# Altium PCB DCDC_POWER_SUPPLY_V2.PcbDoc (part 2 of 3)
Units mm, origin at the board's own origin, x right, y up, seen from the top; angles counter-clockwise.
Board outline 41 x 24.5 mm, 4 copper layers (Top Layer, GND 1, GND 2, Bottom Layer), stack 0.603 mm thick; 49 components, 29 nets, 141 pads, 132 vias.
Unrouted connection lines stored in the file: 1.
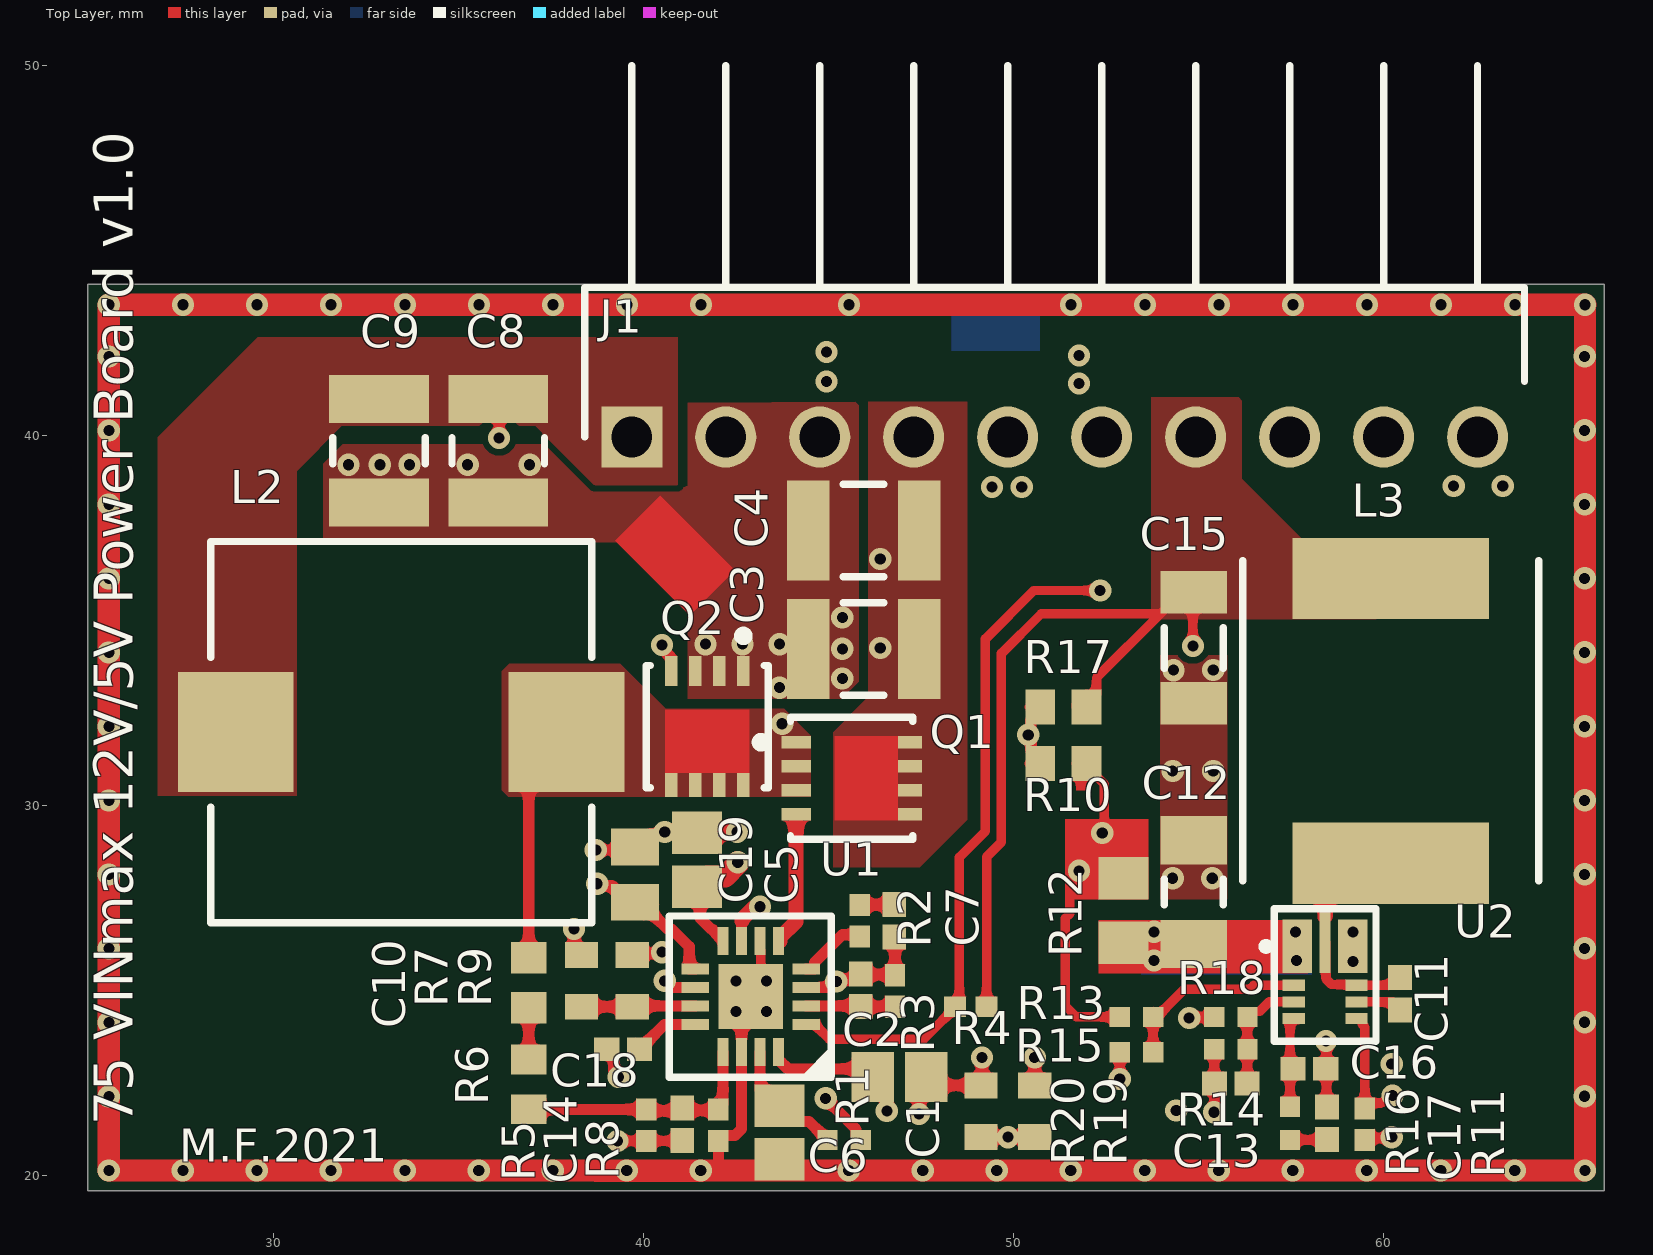
[diagram p0: Top Layer view]

## Part data (continued)
L2: library part CMP-2000-06447-1, "Low Profile, High Current IHLP(R) Inductor, 100 uH, +/- 20%, 2.5 A, -55 to 125 degC, 2-Pin SMD, RoHS, Tape and Reel", Case/Package=4040, Current=1.3A, Current Rating=2.5A, DC Resistance (DCR)=270mR, Inductance Tolerance=20%, Manufacturer=Vishay, Manufacturer Part Number=IHLP4040DZER101M11, Max DC Current=2.25A, Max Operating Temperature=125°C, Maximum DC Resistance=270mOhms, Min Operating Temperature=-55°C, Operating Temperature Range=-55Cto+125C, Package Description="2-Pin Surface Mount Device, Body 10.3 x 10.3 mm", Package Quantity=1, Self Resonant Frequency=1MHz, Test Frequency=100kHz, Brand=Vishay/Dale, Category="Fixed Inductors", ComponentLink1Description=https://datasheet.ciiva.com/11798/0900766b8102c938-11798178.pdf?src-supplier=RSComponents, ComponentLink1URL=https://datasheet.ciiva.com/11798/0900766b8102c938-11798178.pdf?src-supplier=RSComponents, ComponentLink2Description=https://datasheet.ciiva.com/8494/lp40dz11-8494200.pdf?src-supplier=Avnet, ComponentLink2URL=https://datasheet.ciiva.com/8494/lp40dz11-8494200.pdf?src-supplier=Avnet, ComponentLink3Description=https://datasheet.ciiva.com/8017/27487-8017341.pdf?src-supplier=Element14, ComponentLink3URL=https://datasheet.ciiva.com/8017/27487-8017341.pdf?src-supplier=Element14, ComponentLink4Description=https://datasheet.ciiva.com/8017/27487-8017342.pdf?src-supplier=Element14, ComponentLink4URL=https://datasheet.ciiva.com/8017/27487-8017342.pdf?src-supplier=Element14, Contact Plating=Tin, Core Material=Ferrite,Metal,Composite, Datasheet URL=http://www.vishay.com/docs/34192/lp40dz11.pdf, Datasheet Version=08/2015, Depth=10.3mm, Factory Pack Quantity=500, Height=4mm, Height - Seated (Max)=0.157inch, Inductance=100uH, Lead Free="Lead Free", Length=10.3mm, Manufacturer URL=http://www.vishay.com/, Maximum DC Current=2.25A, Military Standard=Not, Mount="Surface Mount,Through Hole", Mounting Style=SMD/SMT, Mounting Technology=SurfaceMount, Number of Pins=2, Package / Case=4040, Package Reference=IHLP4040DZER101M11, Packaging=Reel, Pricing 1="500=0.59680, 1000=0.58220, 2000=0.57400, 3000=0.54128, 4000=0.52934, 5000=0.51740, 50000=0.48006 (USD)", Product=PowerInductors, Product Category=FixedInductors, Qualification=AEC-Q200, Radiation Hardening=No, REACH SVHC=Unknown, RMS Current (Irms)=2.5A, RoHS=True, Saturation Current=2.25A, Series=IHLP-4040DZ-11, Shielding=Shielded, Stock 1=10000, Supplier 1=Avnet, Supplier Part Number 1=IHLP4040DZER101M11, Termination=SMD/SMT, Termination Style=SMD/SMT, Tolerance=20%, Tradename=IHLP, Type=LowProfileHighCurrentIHLPInductor, Unit Weight=0.070548oz, Weight=0.070548oz, Width=10.3mm
L3: library part MPX1D0840L470, "Inductor 22uH", Manufacturer_Name=Kemet, Manufacturer_Part_Number=MPX1D0840L220, Mouser Part Number=80-MPX1D0840L220, Datasheet Link=https://componentsearchengine.com/Datasheets/1/MPX1D0840L470.pdf, Height=4mm, Mouser Price/Stock=https://www.mouser.com/Search/Refine.aspx?Keyword=80-MPX1D0840L470
Q1 Q2: library part CMP-1091-00311-1, "N-Channel OptiMOS 3 Power-Transistor, 80 V VDS, 23 A ID, -55 to 150 degC, PG-TSDSON-8-1, Reel, Green", Manufacturer=Infineon, ComponentLink1Description="Manufacturer URL", ComponentLink1URL=http://www.infineon.com/, ComponentLink2Description=Datasheet, ComponentLink2URL=http://www.infineon.com/dgdl/BSZ340N08NS3G_rev2.3.pdf?folderId=db3a304313b8b5a60113cee8763b02d7&fileId=db3a30431ff9881501206626660b6c72, ComponentLink3Description="Package Specification", ComponentLink3URL=http://www.infineon.com/dgdl/BSZ240N12NS3+Rev2.0.pdf?folderId=db3a304313b8b5a60113cee8763b02d7&fileId=db3a30432a40a650012a42f3057a0038, DatasheetVersion="Rev. 2.3", Green=TRUE, Halogen-free=TRUE, ID (max)="23Â A", IDpuls (max)="92Â A", Mounting Technology="Surface Mount", PackageDescription="8-Pin Plastic (Green) Thin Dual Small Outline Non-Leaded Package, 3.3 x 3.3 mm Body, 0.65 mm Pitch", PackageReference=PG-TSDSON-8-1, PackageVersion="Rev. 02, 09/2008", Packing=Reel, PartNumber=IAUZ20N08S5L300, Polarity=N, Ptot (max)="32Â W", QG="6.8Â nC", RDS (on) (max)="34Â mOhm", RDS (on) (max) (@4.5V)="66Â mOhm", Rth="3.9Â K/W", RthJA (max)="60 K/W", RthJC (max)="3.9Â K/W", VDS (max)="80Â V", VGS(th) (max)="3.5Â V", VGS(th) (min)="2Â V"
R1: library part CMP-2002-00491-1, "RES SMD 2.2M OHM 5% 1/10W 0402", Case Code (Imperial)=0402, Case Code (Metric)=1005, Manufacturer=Panasonic, Manufacturer Part Number=ERJ-2GEJ225X, Max Operating Temperature=155°C, Max Power Dissipation=100mW, Min Operating Temperature=-55°C, Package Quantity=10000, Resistance=2.2MR, Resistance Tolerance=5%, Resistor Type="Thick Film", Supplier Part Number 1=P2.2MJCT-ND, Temperature coefficient=150ppm/°C, Voltage Rating=50V, Case/Package=0402, Category="Chip SMD Resistors", ComponentLink1Description=https://datasheet.ciiva.com/11821/0900766b80f806dd-11821267.pdf?src-supplier=RSComponents, ComponentLink1URL=https://datasheet.ciiva.com/11821/0900766b80f806dd-11821267.pdf?src-supplier=RSComponents, ComponentLink2Description=https://datasheet.ciiva.com/16781/70260739-16781238.pdf?src-supplier=Allied+Electronics, ComponentLink2URL=https://datasheet.ciiva.com/16781/70260739-16781238.pdf?src-supplier=Allied+Electronics, ComponentLink3Description=https://datasheet.ciiva.com/24023/aoa0000ce1-37422-24023607.pdf?src-supplier=Mouser, ComponentLink3URL=https://datasheet.ciiva.com/24023/aoa0000ce1-37422-24023607.pdf?src-supplier=Mouser, ComponentLink4Description=https://datasheet.ciiva.com/43460/1500035-43460408.pdf?src-supplier=Farnell, ComponentLink4URL=https://datasheet.ciiva.com/43460/1500035-43460408.pdf?src-supplier=Farnell, ComponentLink5Description=https://datasheet.ciiva.com/46378/1500035-46378122.pdf?src-supplier=Element14, ComponentLink5URL=https://datasheet.ciiva.com/46378/1500035-46378122.pdf?src-supplier=Element14, ComponentLink6Description=https://datasheet.ciiva.com/16784/70260739-16784747.pdf?src-supplier=Allied+Electronics, ComponentLink6URL=https://datasheet.ciiva.com/16784/70260739-16784747.pdf?src-supplier=Allied+Electronics, ComponentLink7Description=https://datasheet.ciiva.com/30256/4aoa0000ce1-30256685.pdf?src-supplier=Onlinecomponents.com, ComponentLink7URL=https://datasheet.ciiva.com/30256/4aoa0000ce1-30256685.pdf?src-supplier=Onlinecomponents.com, Construction=Rectangular, Contact Plating=Tin, Depth=0.5mm, Features="Automotive AEC-Q200", Height=0.35mm, Lead Free="Contains Lead", Length=1mm, Military Standard=Not, Mount="Surface Mount", Number of Terminations=2, Packaging="Tape and Reel", Part Number=ERJ-2GEJ225X, Power Rating=100mW, Pricing 1="1=0.10000, 10=0.02200, 100=0.00880, 1000=0.00396, 2500=0.00344, 5000=0.00284 (USD)", Radiation Hardening=No, REACH SVHC="No SVHC", RoHS=Yes, RoHS Compliant=Yes, Series=ERJ, Stock 1=12210, Supplier 1=Digi-Key, Technology="THICK FILM", Termination=SMD/SMT, Tolerance=5%, Voltage Rating (DC)=50V, Width=0.02inch
R2: library part CMP-2002-07060-1, "Res Thick Film 0402 3.3 Ohm 1% 1/16W ±200ppm/°C Molded SMD Paper T/R", Case Code (Imperial)=0402, Case Code (Metric)=1005, Manufacturer="Yageo / Phycomp", Manufacturer Part Number=RC0402FR-073R3L, Max Operating Temperature=155°C, Max Power Dissipation=63mW, Min Operating Temperature=-55°C, Resistance=3.3R, Resistance Tolerance=1%, Resistor Type="Thick Film", Supplier Part Number 1=311-3.30LRCT-ND, Temperature coefficient=200ppm/°C, Voltage Rating=50V, Case/Package=0402, Category="Chip SMD Resistors", ComponentLink1Description=https://datasheet.ciiva.com/28412/pyu-rc0402-51-rohs-l-6-28412729.pdf?src-supplier=Avnet+Europe, ComponentLink1URL=https://datasheet.ciiva.com/28412/pyu-rc0402-51-rohs-l-6-28412729.pdf?src-supplier=Avnet+Europe, ComponentLink2Description=https://datasheet.ciiva.com/16856/pyu-rc0402-51-rohs-l-6-16856956.pdf?src-supplier=Avnet+Europe, ComponentLink2URL=https://datasheet.ciiva.com/16856/pyu-rc0402-51-rohs-l-6-16856956.pdf?src-supplier=Avnet+Europe, ComponentLink3Description=https://datasheet.ciiva.com/7849/1018594-7849999.pdf?src-supplier=Element14, ComponentLink3URL=https://datasheet.ciiva.com/7849/1018594-7849999.pdf?src-supplier=Element14, ComponentLink4Description=https://datasheet.ciiva.com/8893/pyu-rc0402-51-rohs-l-6-8893711.pdf?src-supplier=Avnet, ComponentLink4URL=https://datasheet.ciiva.com/8893/pyu-rc0402-51-rohs-l-6-8893711.pdf?src-supplier=Avnet, Construction=Rectangular, Contact Plating=Tin,Matte, Depth=0.5mm, Features="Moisture Resistant", Lead Free="Lead Free", Length=1mm, Military Standard=Not, Number of Terminations=2, Packaging="Tape and Reel", Part Number=RC0402FR-073R3L, Power Rating=63mW, Pricing 1="1=0.10000, 10=0.02400, 100=0.00960, 1000=0.00431, 2500=0.00374, 5000=0.00309 (USD)", REACH SVHC=Unknown, RoHS=Yes, RoHS Compliant=Yes, Series=RC, Size Code=0402, Stock 1=461211, Supplier 1=Digi-Key, Termination=SMD/SMT, Tolerance=1%, Voltage Rating (DC)=50V
R3: library part CMP-2002-07842-1, "RC-L Series 0402 953 Ohm 0.063 W ±1% ±100 ppm/°C SMT Thick Film Chip Resistor", Case Code (Imperial)=0402, Case Code (Metric)=1005, Manufacturer="Yageo / Phycomp", Manufacturer Part Number=RC0402FR-07953RL, Max Operating Temperature=155°C, Max Power Dissipation=63mW, Min Operating Temperature=-55°C, Power Rating=62.5mW, Resistor Type="Thick Film", Supplier Part Number 1=YAG3263CT-ND, Temperature coefficient=100ppm/°C, Tolerance=1%, Voltage Rating=50V, Case/Package=0402, Category="Chip SMD Resistors", ComponentLink1Description=https://datasheet.ciiva.com/16858/pyu-rc0402-51-rohs-l-6-16858058.pdf?src-supplier=Avnet+Europe, ComponentLink1URL=https://datasheet.ciiva.com/16858/pyu-rc0402-51-rohs-l-6-16858058.pdf?src-supplier=Avnet+Europe, ComponentLink2Description=https://datasheet.ciiva.com/28386/pyu-rc0402-51-rohs-l-6-28386955.pdf?src-supplier=Avnet+Europe, ComponentLink2URL=https://datasheet.ciiva.com/28386/pyu-rc0402-51-rohs-l-6-28386955.pdf?src-supplier=Avnet+Europe, ComponentLink3Description=https://datasheet.ciiva.com/12575/pyu-rc0402-51-rohs-l-6-r-8721-12575630.pdf?src-supplier=Mouser, ComponentLink3URL=https://datasheet.ciiva.com/12575/pyu-rc0402-51-rohs-l-6-r-8721-12575630.pdf?src-supplier=Mouser, ComponentLink4Description=https://datasheet.ciiva.com/8884/pyu-rc0402-51-rohs-l-6-8884495.pdf?src-supplier=Avnet, ComponentLink4URL=https://datasheet.ciiva.com/8884/pyu-rc0402-51-rohs-l-6-8884495.pdf?src-supplier=Avnet, Construction=Rectangular, Contact Plating=Tin,Matte, Depth=0.5mm, Features="Moisture Resistant", Height=0.016inch, Lead Free="Lead Free", Length=1mm, Military Standard=Not, Number of Terminations=2, Packaging="Tape and Reel", Part Number=RC0402FR-07953RL, Pricing 1="1=0.10000, 10=0.01600, 100=0.00660, 1000=0.00299, 2500=0.00259, 5000=0.00214 (USD)", Resistance=953R, RoHS=Yes, RoHS Compliant=Yes, Series=RC, Stock 1=3289, Supplier 1=Digi-Key, Termination=SMD/SMT, Voltage Rating (DC)=50V, Width=0.02inch
R4 R11: library part CMP-2002-07343-1, "Res General Purpose Thick Film 0402 100K Ohm 1% 1/16W ±100ppm/°C Molded SMD Paper T/R", Case Code (Imperial)=0402, Case Code (Metric)=1005, Manufacturer="Yageo / Phycomp", Manufacturer Part Number=RC0402FR-07100KL, Max Operating Temperature=155°C, Max Power Dissipation=63mW, Min Operating Temperature=-55°C, Package Quantity=1, Resistance=100kR, Resistance Tolerance=1%, Resistor Type="Thick Film", Supplier Part Number 1=311-100KLRCT-ND, Temperature coefficient=100ppm/°C, Voltage Rating=50V, Case/Package=0402, Category="Chip SMD Resistors", ComponentLink1Description=https://datasheet.ciiva.com/11819/0900766b80c66297-11819452.pdf?src-supplier=RSComponents, ComponentLink1URL=https://datasheet.ciiva.com/11819/0900766b80c66297-11819452.pdf?src-supplier=RSComponents, ComponentLink2Description=https://datasheet.ciiva.com/2453/pyu-r-int-thick-7-2453361.pdf?src-supplier=Digi-Key, ComponentLink2URL=https://datasheet.ciiva.com/2453/pyu-r-int-thick-7-2453361.pdf?src-supplier=Digi-Key, ComponentLink3Description=https://datasheet.ciiva.com/2453/pyu-r-int-thick-7-2453362.pdf?src-supplier=Digi-Key, ComponentLink3URL=https://datasheet.ciiva.com/2453/pyu-r-int-thick-7-2453362.pdf?src-supplier=Digi-Key, ComponentLink4Description=https://datasheet.ciiva.com/2453/pyu-r-int-thick-7-2453363.pdf?src-supplier=Digi-Key, ComponentLink4URL=https://datasheet.ciiva.com/2453/pyu-r-int-thick-7-2453363.pdf?src-supplier=Digi-Key, ComponentLink5Description=https://datasheet.ciiva.com/22747/1018594-22747509.pdf?src-supplier=Element14, ComponentLink5URL=https://datasheet.ciiva.com/22747/1018594-22747509.pdf?src-supplier=Element14, ComponentLink6Description=https://datasheet.ciiva.com/15189/getdatasheetpartid-323696-15189334.pdf?src-supplier=Verical, ComponentLink6URL=https://datasheet.ciiva.com/15189/getdatasheetpartid-323696-15189334.pdf?src-supplier=Verical, ComponentLink7Description=https://datasheet.ciiva.com/12667/pyu-rc0402-51-rohs-l-6-r-12667930.pdf?src-supplier=Mouser, ComponentLink7URL=https://datasheet.ciiva.com/12667/pyu-rc0402-51-rohs-l-6-r-12667930.pdf?src-supplier=Mouser, Construction=Rectangular, Depth=0.5mm, Features="Moisture Resistant", Height=0.016inch, Lead Free="Lead Free", Length=0.039inch, Military Standard=Not, Number of Terminations=2, Packaging="Tape and Reel", Part Number=RC0402FR-07100KL, Power Rating=63mW, Pricing 1="1=0.10000, 10=0.01600, 100=0.00640, 1000=0.00286, 2500=0.00248, 5000=0.00205 (USD)", REACH SVHC="No SVHC", RoHS=Yes, RoHS Compliant=Yes, Series=RC, Stock 1=17727422, Supplier 1=Digi-Key, Technology="THICK FILM", Termination=SMD/SMT, Tolerance=1%, Width=0.02inch, Working Voltage=50V
R5: library part CMP-2002-07052-1, "Res Thick Film 0402 19.1K Ohm 1% 1/16W ±100ppm/°C Molded SMD Paper T/R", Case Code (Imperial)=0402, Case Code (Metric)=1005, Manufacturer="Yageo / Phycomp", Manufacturer Part Number=RC0402FR-0719K1L, Max Operating Temperature=155°C, Max Power Dissipation=63mW, Min Operating Temperature=-55°C, Package Quantity=1, Power Rating=62.5mW, Resistance=19.1kR, Resistor Type="Thick Film", Supplier Part Number 1=311-19.1KLRCT-ND, Temperature coefficient=100ppm/°C, Tolerance=1%, Voltage Rating=50V, Case/Package=0402, Category="Chip SMD Resistors", ComponentLink1Description=https://datasheet.ciiva.com/17068/pyu-rc0402-51-rohs-l-6-r-17068405.pdf?src-supplier=Future+Electronics, ComponentLink1URL=https://datasheet.ciiva.com/17068/pyu-rc0402-51-rohs-l-6-r-17068405.pdf?src-supplier=Future+Electronics, ComponentLink2Description=https://datasheet.ciiva.com/16869/pyu-rc0402-51-rohs-l-6-16869416.pdf?src-supplier=Avnet+Europe, ComponentLink2URL=https://datasheet.ciiva.com/16869/pyu-rc0402-51-rohs-l-6-16869416.pdf?src-supplier=Avnet+Europe, ComponentLink3Description=https://datasheet.ciiva.com/2553/pyu-r-int-thick-7-2553197.pdf?src-supplier=Digi-Key, ComponentLink3URL=https://datasheet.ciiva.com/2553/pyu-r-int-thick-7-2553197.pdf?src-supplier=Digi-Key, ComponentLink4Description=https://datasheet.ciiva.com/2553/pyu-r-int-thick-7-2553198.pdf?src-supplier=Digi-Key, ComponentLink4URL=https://datasheet.ciiva.com/2553/pyu-r-int-thick-7-2553198.pdf?src-supplier=Digi-Key, ComponentLink5Description=https://datasheet.ciiva.com/28402/pyu-rc0402-51-rohs-l-6-28402894.pdf?src-supplier=Avnet+Europe, ComponentLink5URL=https://datasheet.ciiva.com/28402/pyu-rc0402-51-rohs-l-6-28402894.pdf?src-supplier=Avnet+Europe, ComponentLink6Description=https://datasheet.ciiva.com/2553/pyu-r-int-thick-7-2553199.pdf?src-supplier=Digi-Key, ComponentLink6URL=https://datasheet.ciiva.com/2553/pyu-r-int-thick-7-2553199.pdf?src-supplier=Digi-Key, Construction=Rectangular, Contact Plating=Tin,Matte, Depth=0.5mm, Features="Moisture Resistant", Height=0.016inch, Lead Free="Lead Free", Length=0.039inch, Military Standard=Not, Number of Terminations=2, Packaging="Tape and Reel", Part Number=RC0402FR-0719K1L, Pricing 1="1=0.10000, 10=0.01600, 100=0.00660, 1000=0.00299, 2500=0.00259, 5000=0.00214 (USD)", RoHS=Yes, RoHS Compliant=Yes, Series=RC, Size Code=0402, Stock 1=185582, Supplier 1=Digi-Key, Termination=SMD/SMT, Voltage Rating (DC)=50V, Width=0.02inch
R6: library part CMP-2000-00296-1, Case Code (Imperial)=0603, Case Code (Metric)=1608, Manufacturer=Panasonic, Manufacturer Part Number=ERJ-3EKF1803V, Max Operating Temperature=155°C, Max Power Dissipation=100mW, Min Operating Temperature=-55°C, Package Quantity=1, Part Number=ERJ3EKF1803V, Resistance=180kR, Resistance Tolerance=1%, Resistor Type="Thick Film", Supplier Part Number 1=P180KHCT-ND, Temperature coefficient=100ppm/°C, Voltage Rating=75V, Case/Package=0603, Category="Chip SMD Resistors", ComponentLink1Description=https://datasheet.ciiva.com/22739/426256-22739797.pdf?src-supplier=Element14, ComponentLink1URL=https://datasheet.ciiva.com/22739/426256-22739797.pdf?src-supplier=Element14, ComponentLink2Description=https://datasheet.ciiva.com/24162/aoa0000ce2-24162661.pdf?src-supplier=Mouser, ComponentLink2URL=https://datasheet.ciiva.com/24162/aoa0000ce2-24162661.pdf?src-supplier=Mouser, ComponentLink3Description=https://datasheet.ciiva.com/30137/aoa0000ce2-30137813.pdf?src-supplier=Onlinecomponents.com, ComponentLink3URL=https://datasheet.ciiva.com/30137/aoa0000ce2-30137813.pdf?src-supplier=Onlinecomponents.com, ComponentLink4Description=https://datasheet.ciiva.com/46436/1678782-46436790.pdf?src-supplier=Element14, ComponentLink4URL=https://datasheet.ciiva.com/46436/1678782-46436790.pdf?src-supplier=Element14, ComponentLink5Description=https://datasheet.ciiva.com/46436/1678782-46436791.pdf?src-supplier=Element14, ComponentLink5URL=https://datasheet.ciiva.com/46436/1678782-46436791.pdf?src-supplier=Element14, ComponentLink6Description=https://datasheet.ciiva.com/16782/70260748-16782408.pdf?src-supplier=Allied+Electronics, ComponentLink6URL=https://datasheet.ciiva.com/16782/70260748-16782408.pdf?src-supplier=Allied+Electronics, ComponentLink7Description=https://datasheet.ciiva.com/17207/aoa0000ce2-17207208.pdf?src-supplier=Avnet+Europe, ComponentLink7URL=https://datasheet.ciiva.com/17207/aoa0000ce2-17207208.pdf?src-supplier=Avnet+Europe, ComponentLink8Description=https://datasheet.ciiva.com/28568/1678782-28568699.pdf?src-supplier=Element14, ComponentLink8URL=https://datasheet.ciiva.com/28568/1678782-28568699.pdf?src-supplier=Element14, ComponentLink9Description=https://datasheet.ciiva.com/5915/aoa0000ce2-5915294.pdf?src-supplier=Farnell, ComponentLink9URL=https://datasheet.ciiva.com/5915/aoa0000ce2-5915294.pdf?src-supplier=Farnell, ComponentLink10Description=https://datasheet.ciiva.com/9184/aoa0000ce2-9184911.pdf?src-supplier=Avnet, ComponentLink10URL=https://datasheet.ciiva.com/9184/aoa0000ce2-9184911.pdf?src-supplier=Avnet, Construction=Rectangular, Contact Plating=Tin, Depth=0.8mm, Features="Automotive AEC-Q200", Height=0.022inch, Lead Free="Lead Free", Length=1.6mm, Military Standard=Not, Mount="Surface Mount", Number of Terminations=2, Packaging="Tape and Reel", Power Rating=100mW, Pricing 1="1=0.10000, 10=0.06100, 100=0.02460, 1000=0.01106, 2500=0.00960 (USD)", Radiation Hardening=No, REACH SVHC="No SVHC", RoHS=Yes, RoHS Compliant=Yes, Series=ERJ, Stock 1=113875, Supplier 1=Digi-Key, Termination=SMD/SMT, Tolerance=1%, Voltage Rating (DC)=75V, Weight=7.1E-05oz, Width=0.031inch
R7 R20: library part CMP-2100-03662-1, "Chip Resistor, 100 KOhm, +/- 1%, 0.1 W, -55 to 155 degC, 0603 (1608 Metric), RoHS, Tape and Reel", Case Code (Imperial)=0603, Case Code (Metric)=1608, Manufacturer=Yageo, Manufacturer Part Number=RC0603FR-07100KL, Max Operating Temperature=155degC, Max Power Dissipation=100mW, Min Operating Temperature=-55degC, Package Description="2-Pin Surface Mount Device, Body 1.6 x 0.8 mm", Resistance=100KOhm, Resistance Tolerance=1%, Resistor Type="Thick Film", Supplier Part Number 1=311-100KHRCT-ND, Temperature coefficient=100ppm/degreesC, Voltage Rating=50V, Working Voltage=75V, Case/Package=0603, Category="Chip SMD Resistors", ComponentLink1Description=https://datasheet.ciiva.com/11808/0900766b80f96399-11808107.pdf?src-supplier=RSComponents, ComponentLink1URL=https://datasheet.ciiva.com/11808/0900766b80f96399-11808107.pdf?src-supplier=RSComponents, ComponentLink2Description=https://datasheet.ciiva.com/7983/443971-7983593.pdf?src-supplier=Element14, ComponentLink2URL=https://datasheet.ciiva.com/7983/443971-7983593.pdf?src-supplier=Element14, ComponentLink3Description=https://datasheet.ciiva.com/46440/1868787-46440889.pdf?src-supplier=Element14, ComponentLink3URL=https://datasheet.ciiva.com/46440/1868787-46440889.pdf?src-supplier=Element14, ComponentLink4Description=https://datasheet.ciiva.com/7746/1738695-7746234.pdf?src-supplier=Element14, ComponentLink4URL=https://datasheet.ciiva.com/7746/1738695-7746234.pdf?src-supplier=Element14, ComponentLink5Description=https://datasheet.ciiva.com/7746/1738695-7746235.pdf?src-supplier=Element14, ComponentLink5URL=https://datasheet.ciiva.com/7746/1738695-7746235.pdf?src-supplier=Element14, ComponentLink6Description=https://datasheet.ciiva.com/22747/443971-22747516.pdf?src-supplier=Element14, ComponentLink6URL=https://datasheet.ciiva.com/22747/443971-22747516.pdf?src-supplier=Element14, Composition=ThickFilm, Construction=Rectangular, Datasheet URL=http://www.yageo.com/NewPortal/yageodocoutput?fileName=/pdf/R-Chip/PYu-RC_Group_51_RoHS_L_5.pdf, Datasheet Version="Rev. 5, 10/2016", Depth=0.8mm, Features="Moisture Resistant", Height=0.45mm, Lead Free=LeadFree, Length=1.6mm, Manufacturer URL=http://www.yageo.com/, Military Standard=Not, Number of Pins=2, Number of Terminations=2, Package Reference=0603, Packaging=TapeandReel, Power Rating=100mW, Pricing 1="1=0.10000, 10=0.02400, 100=0.00970, 1000=0.00436, 2500=0.00378 (USD)", REACH SVHC=NoSVHC, RoHS=Yes, RoHS Compliant=Yes, RoHSCompliant=true, Series=RC, Supplier 1=Digi-Key, Technology="THICK FILM", Termination=SMD/SMT, Tolerance=1%, Voltage Rating (DC)=50V, Width=0.8mm
  R7: Stock 1=19283456
  R20: Stock 1=19737322
R8: library part CMP-2002-07472-1, Case Code (Imperial)=0402, Case Code (Metric)=1005, Manufacturer="Yageo / Phycomp", Manufacturer Part Number=RC0402FR-071KL, Max Operating Temperature=155°C, Max Power Dissipation=63mW, Min Operating Temperature=-55°C, Power Rating=62.5mW, Resistance=1kR, Resistance Tolerance=1%, Resistor Type="Thick Film", Supplier Part Number 1=311-1.00KLRCT-ND, Temperature coefficient=100ppm/°C, Voltage Rating=50V, Case/Package=0402, Category="Chip SMD Resistors", ComponentLink1Description=https://datasheet.ciiva.com/11819/0900766b80c66297-11819477.pdf?src-supplier=RSComponents, ComponentLink1URL=https://datasheet.ciiva.com/11819/0900766b80c66297-11819477.pdf?src-supplier=RSComponents, ComponentLink2Description=https://datasheet.ciiva.com/12666/pyu-rc0402-51-rohs-l-6-r-12666741.pdf?src-supplier=Mouser, ComponentLink2URL=https://datasheet.ciiva.com/12666/pyu-rc0402-51-rohs-l-6-r-12666741.pdf?src-supplier=Mouser, ComponentLink3Description=https://datasheet.ciiva.com/17063/pyu-rc0402-51-rohs-l-6-r-17063193.pdf?src-supplier=Future+Electronics, ComponentLink3URL=https://datasheet.ciiva.com/17063/pyu-rc0402-51-rohs-l-6-r-17063193.pdf?src-supplier=Future+Electronics, ComponentLink4Description=https://datasheet.ciiva.com/22747/1018594-22747513.pdf?src-supplier=Element14, ComponentLink4URL=https://datasheet.ciiva.com/22747/1018594-22747513.pdf?src-supplier=Element14, ComponentLink5Description=https://datasheet.ciiva.com/7849/1018594-7849869.pdf?src-supplier=Element14, ComponentLink5URL=https://datasheet.ciiva.com/7849/1018594-7849869.pdf?src-supplier=Element14, ComponentLink6Description=https://datasheet.ciiva.com/7983/1018594-7983502.pdf?src-supplier=Element14, ComponentLink6URL=https://datasheet.ciiva.com/7983/1018594-7983502.pdf?src-supplier=Element14, ComponentLink7Description=https://datasheet.ciiva.com/7849/1018594-7849871.pdf?src-supplier=Element14, ComponentLink7URL=https://datasheet.ciiva.com/7849/1018594-7849871.pdf?src-supplier=Element14, Construction=Rectangular, Depth=0.5mm, Features="Moisture Resistant", Height=0.32mm, Lead Free="Lead Free", Length=1mm, Military Standard=Not, Number of Pins=2, Number of Terminations=2, Packaging="Tape and Reel", Part Number=RC0402FR-071KL, Pricing 1="1=0.10000, 10=0.01600, 100=0.00660, 1000=0.00299, 2500=0.00259, 5000=0.00214 (USD)", REACH SVHC=Unknown, RoHS=Yes, RoHS Compliant=Yes, Series=RC, Size Code=0402, Stock 1=21620273, Supplier 1=Digi-Key, Technology="THICK FILM", Termination=SMD/SMT, Tolerance=1%, Voltage Rating (DC)=50V, Width=0.5mm
R9: library part CMP-1659-00044-1, "Chip Resistor, 150 KOhm, +/- 1%, 0.1 W, -55 to 155 degC, 0603 (1608 Metric), RoHS, Tape and Reel", Case Code (Imperial)=0603, Case Code (Metric)=1608, Manufacturer=Yageo, Manufacturer Part Number=RC0603FR-07150KL, Max Operating Temperature=155°C, Max Power Dissipation=100mW, Min Operating Temperature=-55°C, Package Quantity=1, Resistance=150kR, Resistance Tolerance=1%, Resistor Type="Thick Film", Supplier Part Number 1=311-150KHRCT-ND, Temperature coefficient=100ppm/°C, Voltage Rating=50V, Case/Package=0603, Category="Chip SMD Resistors", ComponentLink1Description="Manufacturer URL", ComponentLink1URL=http://www.yageo.com/, ComponentLink2Description=Datasheet, ComponentLink2URL=http://www.yageo.com/documents/recent/PYu-RC_Group_51_RoHS_L_04.pdf, ComponentLink3Description=https://datasheet.ciiva.com/2454/pyu-r-int-thick-7-2454080.pdf?src-supplier=Digi-Key, ComponentLink3URL=https://datasheet.ciiva.com/2454/pyu-r-int-thick-7-2454080.pdf?src-supplier=Digi-Key, ComponentLink4Description=https://datasheet.ciiva.com/15189/getdatasheetpartid-326478-15189611.pdf?src-supplier=Verical, ComponentLink4URL=https://datasheet.ciiva.com/15189/getdatasheetpartid-326478-15189611.pdf?src-supplier=Verical, ComponentLink5Description=https://datasheet.ciiva.com/46412/443971-46412843.pdf?src-supplier=Element14, ComponentLink5URL=https://datasheet.ciiva.com/46412/443971-46412843.pdf?src-supplier=Element14, ComponentLink6Description=https://datasheet.ciiva.com/46440/1868787-46440892.pdf?src-supplier=Element14, ComponentLink6URL=https://datasheet.ciiva.com/46440/1868787-46440892.pdf?src-supplier=Element14, ComponentLink7Description=https://datasheet.ciiva.com/2454/pyu-r-int-thick-7-2454078.pdf?src-supplier=Digi-Key, ComponentLink7URL=https://datasheet.ciiva.com/2454/pyu-r-int-thick-7-2454078.pdf?src-supplier=Digi-Key, ComponentLink8Description=https://datasheet.ciiva.com/7746/443971-7746254.pdf?src-supplier=Element14, ComponentLink8URL=https://datasheet.ciiva.com/7746/443971-7746254.pdf?src-supplier=Element14, ComponentLink9Description=https://datasheet.ciiva.com/2454/pyu-r-int-thick-7-2454079.pdf?src-supplier=Digi-Key, ComponentLink9URL=https://datasheet.ciiva.com/2454/pyu-r-int-thick-7-2454079.pdf?src-supplier=Digi-Key, ComponentLink10Description=https://datasheet.ciiva.com/7746/443971-7746255.pdf?src-supplier=Element14, ComponentLink10URL=https://datasheet.ciiva.com/7746/443971-7746255.pdf?src-supplier=Element14, Construction=Rectangular, DatasheetVersion="Rev. 4, 02/2016", Depth=0.8mm, Features="Moisture Resistant", Height=0.022inch, Lead Free="Lead Free", Length=0.063inch, Military Standard=Not, Number of Pins=2, Number of Terminations=2, PackageDescription="2-Pin Surface Mount Device, Body 1.6 x 0.8 mm", PackageReference=0603, Packaging="Tape and Reel", Power Rating=100mW, Pricing 1="1=0.10000, 10=0.02400, 100=0.00970, 1000=0.00436, 2500=0.00378 (USD)", REACH SVHC="No SVHC", RoHS=Yes, RoHS Compliant=Yes, Series=RC, Size Code=0603, Stock 1=824633, Supplier 1=Digi-Key, Termination=SMD/SMT, Tolerance=1%, Voltage Rating (DC)=50V, Width=0.031inch
R10 R17: library part CMP-2000-03207-1, Case Code (Imperial)=0603, Case Code (Metric)=1608, Manufacturer="Vishay Dale", Manufacturer Part Number=CRCW06032R20FNEA, Max Operating Temperature=155°C, Max Power Dissipation=100mW, Min Operating Temperature=-55°C, Package Quantity=10, Resistance Tolerance=1%, Resistor Type="Thick Film", Supplier Part Number 1=541-2.20HCT-ND, Temperature coefficient=200ppm/°C, Voltage Rating=75V, Case/Package=0603, Category="Chip SMD Resistors", ComponentLink1Description=https://datasheet.ciiva.com/5543/dcrcwe3-109170-5543206.pdf?src-supplier=Mouser, ComponentLink1URL=https://datasheet.ciiva.com/5543/dcrcwe3-109170-5543206.pdf?src-supplier=Mouser, ComponentLink2Description=https://datasheet.ciiva.com/9090/dcrcwe3-9090939.pdf?src-supplier=Avnet, ComponentLink2URL=https://datasheet.ciiva.com/9090/dcrcwe3-9090939.pdf?src-supplier=Avnet, ComponentLink3Description=https://datasheet.ciiva.com/2562/dcrcwe3-2562607.pdf?src-supplier=Digi-Key, ComponentLink3URL=https://datasheet.ciiva.com/2562/dcrcwe3-2562607.pdf?src-supplier=Digi-Key, ComponentLink4Description=https://datasheet.ciiva.com/2562/dcrcwe3-2562608.pdf?src-supplier=Digi-Key, ComponentLink4URL=https://datasheet.ciiva.com/2562/dcrcwe3-2562608.pdf?src-supplier=Digi-Key, ComponentLink5Description=https://datasheet.ciiva.com/2562/dcrcwe3-2562609.pdf?src-supplier=Digi-Key, ComponentLink5URL=https://datasheet.ciiva.com/2562/dcrcwe3-2562609.pdf?src-supplier=Digi-Key, Construction=Rectangular, Contact Plating=Tin, Depth=0.85mm, Features="Automotive AEC-Q200", Height=0.45mm, Lead Free="Lead Free", Length=1.55mm, Military Standard=Not, Number of Pins=2, Number of Terminations=2, Packaging="Tape and Reel", Part Number=CRCW06032R20FNEA, Power Rating=100mW, Pricing 1="1=0.10000, 10=0.05800, 100=0.02340, 1000=0.01051, 2500=0.00912 (USD)", Radiation Hardening=No, REACH SVHC=Unknown, Resistance=2.2R, RoHS=Yes, RoHS Compliant=Yes, Series=CRCW, Size Code=0603, Stock 1=18961, Supplier 1=Digi-Key, Technology="THICK FILM", Termination=SMD/SMT, Tolerance=1%, Voltage Rating (DC)=75V, Weight=7.1E-05oz, Width=0.033inch
R12: library part CMP-1665-00033-1, "Chip Resistor, 4.7 Ohm, +/- 1%, 125 mW, -55 to 125 degC, 0805 (2012 Metric), RoHS, Tape and Reel", Case Code (Imperial)=0805, Case Code (Metric)=2012, Manufacturer=Panasonic, Manufacturer Part Number=ERJ-6RQF4R7V, Max Operating Temperature="125 degC", Max Power Dissipation=125mW, Min Operating Temperature="-55 degC", Package Quantity=5000, Power Rating="125 mW", Resistance="4.7 Ohm", Supplier Part Number 1=P4.7DCT-ND, Temperature coefficient=200ppm/°C, Tolerance=1%, Case/Package=0805, Case\/Package=0805, Category="Chip SMD Resistors", ComponentLink1Description="Manufacturer URL", ComponentLink1URL=http://www.panasonic.com/, ComponentLink2Description=Datasheet, ComponentLink2URL=http://industrial.panasonic.com/cdbs/www-data/pdf/RDA0000/AOA0000C86.pdf, ComponentLink3Description=https://datasheet.ciiva.com/11818/0900766b80eefa12-11818492.pdf?src-supplier=RSComponents, ComponentLink3URL=https://datasheet.ciiva.com/11818/0900766b80eefa12-11818492.pdf?src-supplier=RSComponents, ComponentLink4Description=https://datasheet.ciiva.com/25711/391509-25711737.pdf?src-supplier=Farnell, ComponentLink4URL=https://datasheet.ciiva.com/25711/391509-25711737.pdf?src-supplier=Farnell, ComponentLink5Description=https://datasheet.ciiva.com/17213/aoa0000ce3-17213115.pdf?src-supplier=Avnet+Europe, ComponentLink5URL=https://datasheet.ciiva.com/17213/aoa0000ce3-17213115.pdf?src-supplier=Avnet+Europe, ComponentLink6Description=https://datasheet.ciiva.com/22746/391509-22746507.pdf?src-supplier=Element14, ComponentLink6URL=https://datasheet.ciiva.com/22746/391509-22746507.pdf?src-supplier=Element14, ComponentLink7Description=https://datasheet.ciiva.com/9195/aoa0000ce3-9195709.pdf?src-supplier=Avnet, ComponentLink7URL=https://datasheet.ciiva.com/9195/aoa0000ce3-9195709.pdf?src-supplier=Avnet, ComponentLink8Description=https://datasheet.ciiva.com/16761/70068852-16761070.pdf?src-supplier=Allied+Electronics, ComponentLink8URL=https://datasheet.ciiva.com/16761/70068852-16761070.pdf?src-supplier=Allied+Electronics, ComponentLink9Description=https://datasheet.ciiva.com/22730/391509-22730382.pdf?src-supplier=Element14, ComponentLink9URL=https://datasheet.ciiva.com/22730/391509-22730382.pdf?src-supplier=Element14, ComponentLink10Description=https://datasheet.ciiva.com/24026/aoa0000ce3-72189-24026846.pdf?src-supplier=Mouser, ComponentLink10URL=https://datasheet.ciiva.com/24026/aoa0000ce3-72189-24026846.pdf?src-supplier=Mouser, ComponentLink11Description=https://datasheet.ciiva.com/30074/6aoa0000ce3-30074670.pdf?src-supplier=Onlinecomponents.com, ComponentLink11URL=https://datasheet.ciiva.com/30074/6aoa0000ce3-30074670.pdf?src-supplier=Onlinecomponents.com, Composition="Thick Film", Contact Plating=Tin, DatasheetVersion=04/2015, Depth=1.25mm, Height="0.028 inch", Lead Free="Lead Free", Length="0.079 inch", Military Standard=Not, Mount="Surface Mount", Mounting Technology="Surface Mount", Number of Pins=2, Number of Terminations=2, PackageDescription="2-Pin Surface Mount Device, Body 2 x 1.5 mm", PackageReference=0805, Packaging="Tape and Reel", PartNumber=ERJ-6RQF4R7V, Pins=2, Pricing 1="1=0.37000, 10=0.31100, 25=0.22640, 50=0.16420, 100=0.12170, 250=0.09340, 500=0.07358, 1000=0.05094 (USD)", Radiation Hardening=No, REACH SVHC="No SVHC", RoHS=Yes, RoHSCompliant=true, Stock 1=7470, Supplier 1=Digi-Key, Termination=SMD/SMT, Width="0.049 inch"
R13 R15: library part CMP-2002-00968-1, "ERJ-2RKF4993X", Case Code (Imperial)=0402, Case Code (Metric)=1005, Manufacturer=Panasonic, Max Operating Temperature=155°C, Max Power Dissipation=100mW, Min Operating Temperature=-55°C, Package Quantity=1, Resistance=499kR, Supplier Part Number 1=P499KLCT-ND, Temperature coefficient=100ppm/°C, Tolerance=1%, Voltage Rating=50V, Case/Package=0402, Category="Chip SMD Resistors", ComponentLink1Description=https://datasheet.ciiva.com/28610/1678782-28610966.pdf?src-supplier=Element14, ComponentLink1URL=https://datasheet.ciiva.com/28610/1678782-28610966.pdf?src-supplier=Element14, ComponentLink2Description=https://datasheet.ciiva.com/24163/aoa0000ce2-24163576.pdf?src-supplier=Mouser, ComponentLink2URL=https://datasheet.ciiva.com/24163/aoa0000ce2-24163576.pdf?src-supplier=Mouser, ComponentLink3Description=https://datasheet.ciiva.com/9181/aoa0000ce2-9181513.pdf?src-supplier=Avnet, ComponentLink3URL=https://datasheet.ciiva.com/9181/aoa0000ce2-9181513.pdf?src-supplier=Avnet, ComponentLink4Description=https://datasheet.ciiva.com/5951/426256-5951322.pdf?src-supplier=Farnell, ComponentLink4URL=https://datasheet.ciiva.com/5951/426256-5951322.pdf?src-supplier=Farnell, ComponentLink5Description=https://datasheet.ciiva.com/43460/426256-43460346.pdf?src-supplier=Farnell, ComponentLink5URL=https://datasheet.ciiva.com/43460/426256-43460346.pdf?src-supplier=Farnell, ComponentLink6Description=https://datasheet.ciiva.com/9181/aoa0000ce2-9181509.pdf?src-supplier=Avnet, ComponentLink6URL=https://datasheet.ciiva.com/9181/aoa0000ce2-9181509.pdf?src-supplier=Avnet, ComponentLink7Description=https://datasheet.ciiva.com/28672/1678782-28672345.pdf?src-supplier=Element14, ComponentLink7URL=https://datasheet.ciiva.com/28672/1678782-28672345.pdf?src-supplier=Element14, ComponentLink8Description=https://datasheet.ciiva.com/46377/426256-46377753.pdf?src-supplier=Element14, ComponentLink8URL=https://datasheet.ciiva.com/46377/426256-46377753.pdf?src-supplier=Element14, ComponentLink9Description=https://datasheet.ciiva.com/16760/70260748-16760715.pdf?src-supplier=Allied+Electronics, ComponentLink9URL=https://datasheet.ciiva.com/16760/70260748-16760715.pdf?src-supplier=Allied+Electronics, Composition="Thick Film", Contact Plating=Tin, Depth=0.5mm, Features="Automotive AEC-Q200", Height=0.016inch, Lead Free="Lead Free", Length=1mm, Manufacturer Part Number=ERJ-2RKF4993X, Military Standard=Not, Mount="Surface Mount", Number of Terminations=2, Packaging="Tape and Reel", Part Number=ERJ-2RKF4993X, Power Rating=100mW, Pricing 1="1=0.10000, 10=0.04000, 100=0.01620, 1000=0.00729, 2500=0.00632, 5000=0.00523 (USD)", REACH SVHC=Unknown, RoHS=Yes, Stock 1=131008, Supplier 1=Digi-Key, Termination=SMD/SMT, Voltage Rating (DC)=50V, Weight=2.8E-05oz, Width=0.5mm
R14: library part CMP-2002-00386-1, "RES SMD 158K OHM 1% 1/16W 0402", Case Code (Imperial)=0402, Case Code (Metric)=1005, Manufacturer="Vishay Dale", Manufacturer Part Number=CRCW0402158KFKTD, Max Operating Temperature=155°C, Max Power Dissipation=63mW, Min Operating Temperature=-55°C, Package Quantity=10000, Resistance=158kR, Resistance Tolerance=1%, Resistor Type="Thick Film", Temperature coefficient=100ppm/°C, Voltage Rating=50V, Case/Package=0402, Category="Chip SMD Resistors", ComponentLink1Description=https://datasheet.ciiva.com/8967/dcrcw-8967692.pdf?src-supplier=Avnet, ComponentLink1URL=https://datasheet.ciiva.com/8967/dcrcw-8967692.pdf?src-supplier=Avnet, ComponentLink2Description=https://datasheet.ciiva.com/2563/dcrcw-2563087.pdf?src-supplier=Digi-Key, ComponentLink2URL=https://datasheet.ciiva.com/2563/dcrcw-2563087.pdf?src-supplier=Digi-Key, Contact Plating=Tin,Lead, Features="Automotive AEC-Q200", Height=0.016inch, Lead Free="Contains Lead", Length=0.039inch, Number of Pins=2, Number of Terminations=2, Packaging="Tape and Reel", Part Number=CRCW0402158KFKTD, Power Rating=63mW, Pricing 1="10000=0.02620, 20000=0.02556, 40000=0.02520, 60000=0.02448, 80000=0.02394, 100000=0.02340, 1000000=0.02286 (USD)", Radiation Hardening=No, REACH SVHC=Unknown, RoHS=No, RoHS Compliant=No, Series=CRCW, Stock 1=10000, Supplier 1=Avnet, Supplier Part Number 1=CRCW0402158KFKTD, Termination=SMD/SMT, Tolerance=1%, Voltage Rating (DC)=50V, Weight=2.3E-05oz, Width=0.02inch
R16: library part CMP-2002-08626-1, "Surface Mount Chip Resistor, Thick Film, AEC-Q200 CRCW Series, 42.2 kohm, 63 mW,  1%, 50 V", Case Code (Imperial)=0402, Case Code (Metric)=1005, Manufacturer="Vishay Dale", Manufacturer Part Number=CRCW040242K2FKED, Max Operating Temperature=155°C, Max Power Dissipation=63mW, Min Operating Temperature=-55°C, Package Quantity=10, Resistance=42.2kR, Resistance Tolerance=1%, Resistor Type="Thick Film", Supplier Part Number 1=52K7062, Temperature coefficient=100ppm/°C, Voltage Rating=50V, Case/Package=0402, Category="Chip SMD Resistors", ComponentLink1Description=https://datasheet.ciiva.com/3882/41397335s9853079n6892-3882805.pdf?src-supplier=Arrow+Electronics, ComponentLink1URL=https://datasheet.ciiva.com/3882/41397335s9853079n6892-3882805.pdf?src-supplier=Arrow+Electronics, ComponentLink2Description=https://datasheet.ciiva.com/11818/0900766b80d98824-11818095.pdf?src-supplier=RSComponents, ComponentLink2URL=https://datasheet.ciiva.com/11818/0900766b80d98824-11818095.pdf?src-supplier=RSComponents, ComponentLink3Description=https://datasheet.ciiva.com/2494/dcrcwe3-2494976.pdf?src-supplier=Digi-Key, ComponentLink3URL=https://datasheet.ciiva.com/2494/dcrcwe3-2494976.pdf?src-supplier=Digi-Key, ComponentLink4Description=https://datasheet.ciiva.com/2494/dcrcwe3-2494977.pdf?src-supplier=Digi-Key, ComponentLink4URL=https://datasheet.ciiva.com/2494/dcrcwe3-2494977.pdf?src-supplier=Digi-Key, ComponentLink5Description=https://datasheet.ciiva.com/3256/dcrcwe3-3256517.pdf?src-supplier=Avnet, ComponentLink5URL=https://datasheet.ciiva.com/3256/dcrcwe3-3256517.pdf?src-supplier=Avnet, ComponentLink6Description=https://datasheet.ciiva.com/16763/70201119-16763237.pdf?src-supplier=Allied+Electronics, ComponentLink6URL=https://datasheet.ciiva.com/16763/70201119-16763237.pdf?src-supplier=Allied+Electronics, ComponentLink7Description=https://datasheet.ciiva.com/8336/dcrcwe3-8336730.pdf?src-supplier=Avnet, ComponentLink7URL=https://datasheet.ciiva.com/8336/dcrcwe3-8336730.pdf?src-supplier=Avnet, ComponentLink8Description=https://datasheet.ciiva.com/7743/125364-7743643.pdf?src-supplier=Element14, ComponentLink8URL=https://datasheet.ciiva.com/7743/125364-7743643.pdf?src-supplier=Element14, ComponentLink9Description=https://datasheet.ciiva.com/2494/dcrcwe3-2494975.pdf?src-supplier=Digi-Key, ComponentLink9URL=https://datasheet.ciiva.com/2494/dcrcwe3-2494975.pdf?src-supplier=Digi-Key, ComponentLink10Description=https://datasheet.ciiva.com/7671/1697337-7671599.pdf?src-supplier=Element14, ComponentLink10URL=https://datasheet.ciiva.com/7671/1697337-7671599.pdf?src-supplier=Element14, ComponentLink11Description=https://datasheet.ciiva.com/22702/1697337-22702879.pdf?src-supplier=Element14, ComponentLink11URL=https://datasheet.ciiva.com/22702/1697337-22702879.pdf?src-supplier=Element14, Construction=Rectangular, Contact Plating=Tin, Depth=0.5mm, Features="Automotive AEC-Q200", Height=0.35mm, Lead Free="Lead Free", Length=1mm, Military Standard=Not, Number of Pins=2, Number of Terminations=2, Packaging="Tape and Reel", Part Number=CRCW040242K2FKED, Power Rating=63mW, Pricing 1="1=0.00500, 25=0.00500, 100=0.00500, 250=0.00500, 500=0.00500, 1000=0.00400 (USD)", Radiation Hardening=No, REACH SVHC=Unknown, RoHS=Yes, RoHS Compliant=Yes, Series=CRCW, Size Code=0402, Stock 1=19822, Supplier 1=Newark, Technology="THICK FILM", Termination=SMD/SMT, Tolerance=1%, Voltage Rating (DC)=50V, Weight=2.3E-05oz, Width=0.02inch
R18: library part CMP-1011-00675-2, "Res Thick Film 0402 30K Ohm 1% 0.063W(1/16W) ±100ppm/C Molded SMD Automotive Paper T/R", Case Code (Imperial)=0402, Case Code (Metric)=1005, Manufacturer="Vishay Dale", Manufacturer Part Number=CRCW040230K0FKED, Max Operating Temperature=155°C, Max Power Dissipation=63mW, Min Operating Temperature=-55°C, Package Quantity=10000, Resistance=30kR, Resistance Tolerance=1%, Resistor Type="Thick Film", Supplier Part Number 1=6789140, Temperature coefficient=100ppm/°C, Voltage Rating=50V, Case/Package=0402, Category="Chip SMD Resistors", ComponentLink1Description=https://datasheet.ciiva.com/11811/0900766b80d98824-11811264.pdf?src-supplier=RSComponents, ComponentLink1URL=https://datasheet.ciiva.com/11811/0900766b80d98824-11811264.pdf?src-supplier=RSComponents, ComponentLink2Description=https://datasheet.ciiva.com/7673/1697337-7673253.pdf?src-supplier=Element14, ComponentLink2URL=https://datasheet.ciiva.com/7673/1697337-7673253.pdf?src-supplier=Element14, ComponentLink3Description=https://datasheet.ciiva.com/2464/dcrcwe3-2464534.pdf?src-supplier=Digi-Key, ComponentLink3URL=https://datasheet.ciiva.com/2464/dcrcwe3-2464534.pdf?src-supplier=Digi-Key, ComponentLink4Description=https://datasheet.ciiva.com/7673/1697337-7673254.pdf?src-supplier=Element14, ComponentLink4URL=https://datasheet.ciiva.com/7673/1697337-7673254.pdf?src-supplier=Element14, ComponentLink5Description=https://datasheet.ciiva.com/2464/dcrcwe3-2464535.pdf?src-supplier=Digi-Key, ComponentLink5URL=https://datasheet.ciiva.com/2464/dcrcwe3-2464535.pdf?src-supplier=Digi-Key, ComponentLink6Description=https://datasheet.ciiva.com/2464/dcrcwe3-2464536.pdf?src-supplier=Digi-Key, ComponentLink6URL=https://datasheet.ciiva.com/2464/dcrcwe3-2464536.pdf?src-supplier=Digi-Key, ComponentLink7Description=https://datasheet.ciiva.com/16886/dcrcwe3-16886248.pdf?src-supplier=Avnet+Europe, ComponentLink7URL=https://datasheet.ciiva.com/16886/dcrcwe3-16886248.pdf?src-supplier=Avnet+Europe, ComponentLink8Description=https://datasheet.ciiva.com/3256/dcrcwe3-3256380.pdf?src-supplier=Avnet, ComponentLink8URL=https://datasheet.ciiva.com/3256/dcrcwe3-3256380.pdf?src-supplier=Avnet, ComponentLink9Description=https://datasheet.ciiva.com/22702/1697337-22702876.pdf?src-supplier=Element14, ComponentLink9URL=https://datasheet.ciiva.com/22702/1697337-22702876.pdf?src-supplier=Element14, ComponentLink10Description=https://datasheet.ciiva.com/16784/70201119-16784286.pdf?src-supplier=Allied+Electronics, ComponentLink10URL=https://datasheet.ciiva.com/16784/70201119-16784286.pdf?src-supplier=Allied+Electronics, Construction=Rectangular, Contact Plating=Tin, Depth=0.5mm, Features="Automotive AEC-Q200", Height=0.35mm, Lead Free="Lead Free", Length=1mm, Military Standard=Not, Mount="Surface Mount", Number of Pins=2, Number of Terminations=2, Packaging="Tape and Reel", Part Number=CRCW040230K0FKED, Power Rating=63mW, Pricing 1="50=0.04000, 500=0.01600, 1250=0.00800 (USD)", Radiation Hardening=No, REACH SVHC=Unknown, RoHS=Yes, RoHS Compliant=Yes, Series=CRCW, Size Code=0402, Stock 1=19350, Supplier 1=RSComponents, Technology="THICK FILM", Termination=SMD/SMT, Tolerance=1%, Voltage Rating (DC)=50V, Weight=2.3E-05oz, Width=0.5mm
R19: library part CMP-2000-04829-1, "RES SMD 1M OHM 1% 1/10W 0603", Case Code (Imperial)=0603, Case Code (Metric)=1608, Manufacturer=Yageo, Manufacturer Part Number=AC0603FR-071ML, Max Operating Temperature=155°C, Max Power Dissipation=100mW, Min Operating Temperature=-55°C, Package Quantity=1, Resistance=1MR, Resistor Type="Thick Film", Supplier Part Number 1=311-1MLDCT-ND, Temperature coefficient=100ppm/°C, Tolerance=1%, Voltage Rating=50V, Case/Package=0603, Category="Chip SMD Resistors", ComponentLink1Description=https://datasheet.ciiva.com/5562/pyu-ac-51-rohs-l-2-5562551.pdf?src-supplier=Mouser, ComponentLink1URL=https://datasheet.ciiva.com/5562/pyu-ac-51-rohs-l-2-5562551.pdf?src-supplier=Mouser, Features="Moisture Resistant,Automotive AEC-Q200,Anti-Sulfur", Height=0.022inch, Lead Free="Lead Free", Length=0.063inch, Number of Terminations=2, Packaging="Tape and Reel", Part Number=AC0603FR-071ML, Power Rating=100mW, Pricing 1="1=0.10000, 10=0.02900, 100=0.01170, 1000=0.00527, 2500=0.00458 (USD)", RoHS=Yes, RoHS Compliant=Yes, Series=AC, Stock 1=1569, Supplier 1=Digi-Key, Termination=SMD/SMT, Width=0.031inch
R21: library part CMP-2001-03163-1, Case Code (Imperial)=0805, Case Code (Metric)=2012, Manufacturer=Susumu, Manufacturer Part Number=RL1220S-R30-F, Max Operating Temperature=125°C, Max Power Dissipation=333mW, Min Operating Temperature=-55°C, Package Quantity=1, Power Rating=330mW, Resistance=300mR, Resistor Type="Thin Film", Supplier Part Number 1=RL12S.30FCT-ND, Temperature coefficient=200ppm/°C, Tolerance=1%, Voltage Rating (DC)=100V, Case/Package=0805, Category="Chip SMD Resistors", ComponentLink1Description=https://datasheet.ciiva.com/2487/rl-data-sheet-2487747.pdf?src-supplier=Digi-Key, ComponentLink1URL=https://datasheet.ciiva.com/2487/rl-data-sheet-2487747.pdf?src-supplier=Digi-Key, ComponentLink2Description=https://datasheet.ciiva.com/2487/rl-data-sheet-2487748.pdf?src-supplier=Digi-Key, ComponentLink2URL=https://datasheet.ciiva.com/2487/rl-data-sheet-2487748.pdf?src-supplier=Digi-Key, ComponentLink3Description=https://datasheet.ciiva.com/2487/rl-data-sheet-2487749.pdf?src-supplier=Digi-Key, ComponentLink3URL=https://datasheet.ciiva.com/2487/rl-data-sheet-2487749.pdf?src-supplier=Digi-Key, ComponentLink4Description=https://datasheet.ciiva.com/12915/e-15-16-12915294.pdf?src-supplier=Mouser, ComponentLink4URL=https://datasheet.ciiva.com/12915/e-15-16-12915294.pdf?src-supplier=Mouser, Height=0.02inch, Lead Free="Lead Free", Length=0.079inch, Number of Terminations=2, Packaging="Tape and Reel", Part Number=RL1220S-R30-F, Pricing 1="1=0.29000, 10=0.24300, 25=0.17640, 50=0.12780, 100=0.09480, 250=0.07276, 500=0.05732, 1000=0.03969 (USD)", RoHS=Yes, RoHS Compliant=Yes, Series=RL, Size Code=0805, Stock 1=212652, Supplier 1=Digi-Key, Technology="THIN FILM", Termination=SMD/SMT, Weight=0.000194oz, Width=0.049inch
U1: "Integrated Circuit", Manufacturer_Name=Microchip, Mouser Part Number=579-MIC2128YML-TR, Arrow Part Number=MIC2128YML-TR, Arrow Price/Stock=https://www.arrow.com/en/products/mic2128yml-tr/microchip-technology, Datasheet Link=https://componentsearchengine.com/Datasheets/1/MIC2128YML-TR.pdf, Height=0.9mm, Manufacturer_Part_Number=MIC2128YML-TR, Mouser Price/Stock=https://www.mouser.co.uk/ProductDetail/Microchip-Technology/MIC2128YML-TR?qs=NoqMqJKvPFLnUo4QxJcPkw%3D%3D
U2: "Integrated Circuit", Manufacturer_Name="Diodes Inc.", Mouser Part Number=621-AP63357QZV-7, Datasheet Link=https://www.diodes.com/assets/Datasheets/AP63356Q_AP63357Q.pdf, Height=0.85mm, Manufacturer_Part_Number=AP63357QZV-7, Mouser Price/Stock=https://www.mouser.co.uk/ProductDetail/Diodes-Incorporated/AP63357QZV-7?qs=DPoM0jnrROUeS%2FU8ZrDy%2FA%3D%3D

## Via types
v1: diameter 0.6, hole 0.3, Top Layer to Bottom Layer, tented both sides, 132 vias

## Nets (pads, with @x,y where several pads share a name; then routed paths per layer and width w, separated by ;. In a path a pad name is that pad's centre, name@x,y a point inside that pad or via, vN(x,y) a via of type N, cw(c..) or ccw(c..) an arc to the next point about the centre after c; other vN are vias at no path point)
EN: R19.1 R20.2 U1.10 | length 15.1
  Top Layer w0.3: v1(40.574,25.251) 40.655,25.251 40.831,25.075 U1.10 ; R20.2 R19.1 R19.1@50.75,20.85
  GND 2 w0.3: v1(40.574,25.251) 40.574,22.701 42.25,21.025 v1(49.85,21.025)
GND: C1.1 C3.1 C4.1 C5.1 C6.1 C8.1 C9.1 C12.1 C15.1 C16.1 C17.1 C18.1 C19.1 C21.1 J1.2 J1.3 J1.6 J1.8 Q2.1 Q2.2 Q2.3 R8.1 R9.1 R15.1 R18.1 R20.1 U1.6 U1.14 U1.17 U2.8 | length 352.2
  Top Layer w0.254: v1(38.713,28.787) 39.687,28.787 C19.1 40.148,29.248 40.445,29.248 40.447,29.25 C5.1 41.223,29.477 40.902,29.477 40.767,29.341 40.641,29.341 v1(40.575,29.275) ; R9.1 39.737,25.988 40.463,25.988 v1(40.5,26.025) ; U1.6@43.175,26.075 43.175,25.4 v1(43.325,25.25) ; v1(52.875,22.6) R15.1 ; v1(54.75,24.25) 54.763,24.262 55.413,24.262 R18.1 ; v1(58.45,23.625) 58.463,23.612 58.463,21.853 C17.1